# Altium PCB somiqboard.PcbDoc (part 1 of 10)
Units mm, origin at the board's own origin, x right, y up, seen from the top; angles counter-clockwise.
Board outline 110 x 96 mm, 4 copper layers (Top Layer, Ground_Plane, Power_Plane, Bottom Layer), stack 1.454 mm thick; 221 components, 356 nets, 1185 pads, 539 vias.
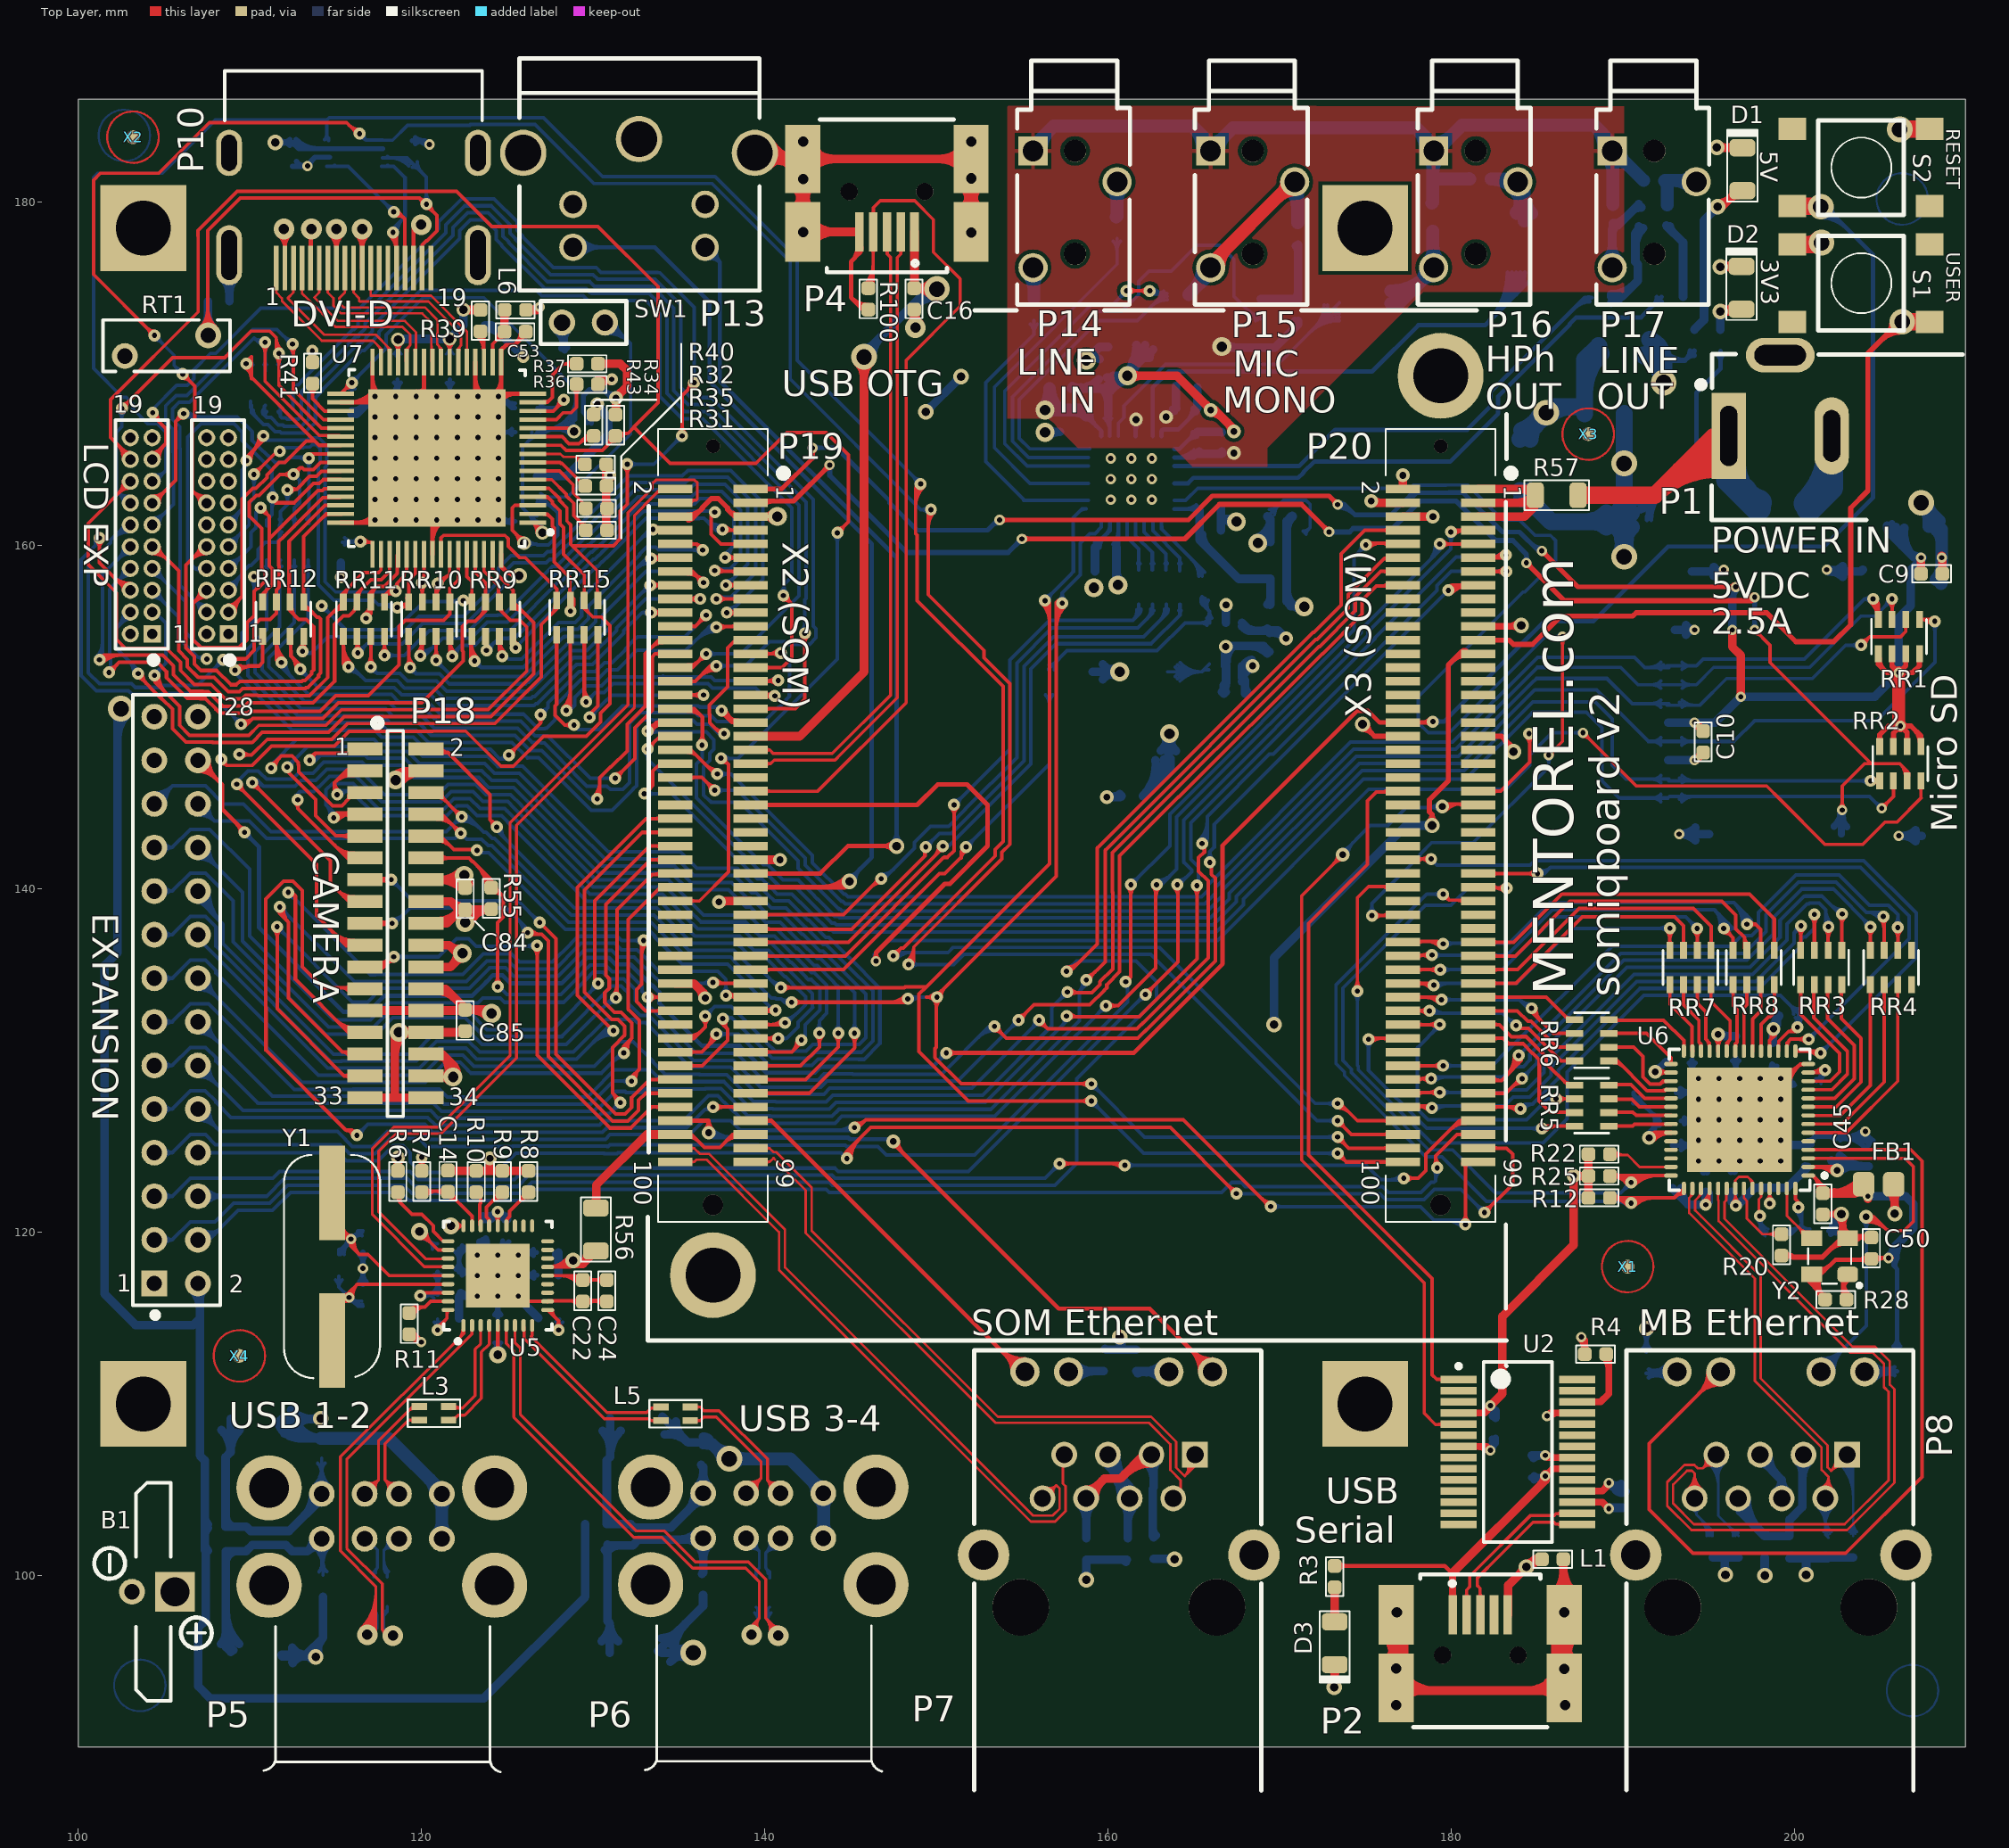
[diagram p0: Top Layer view]
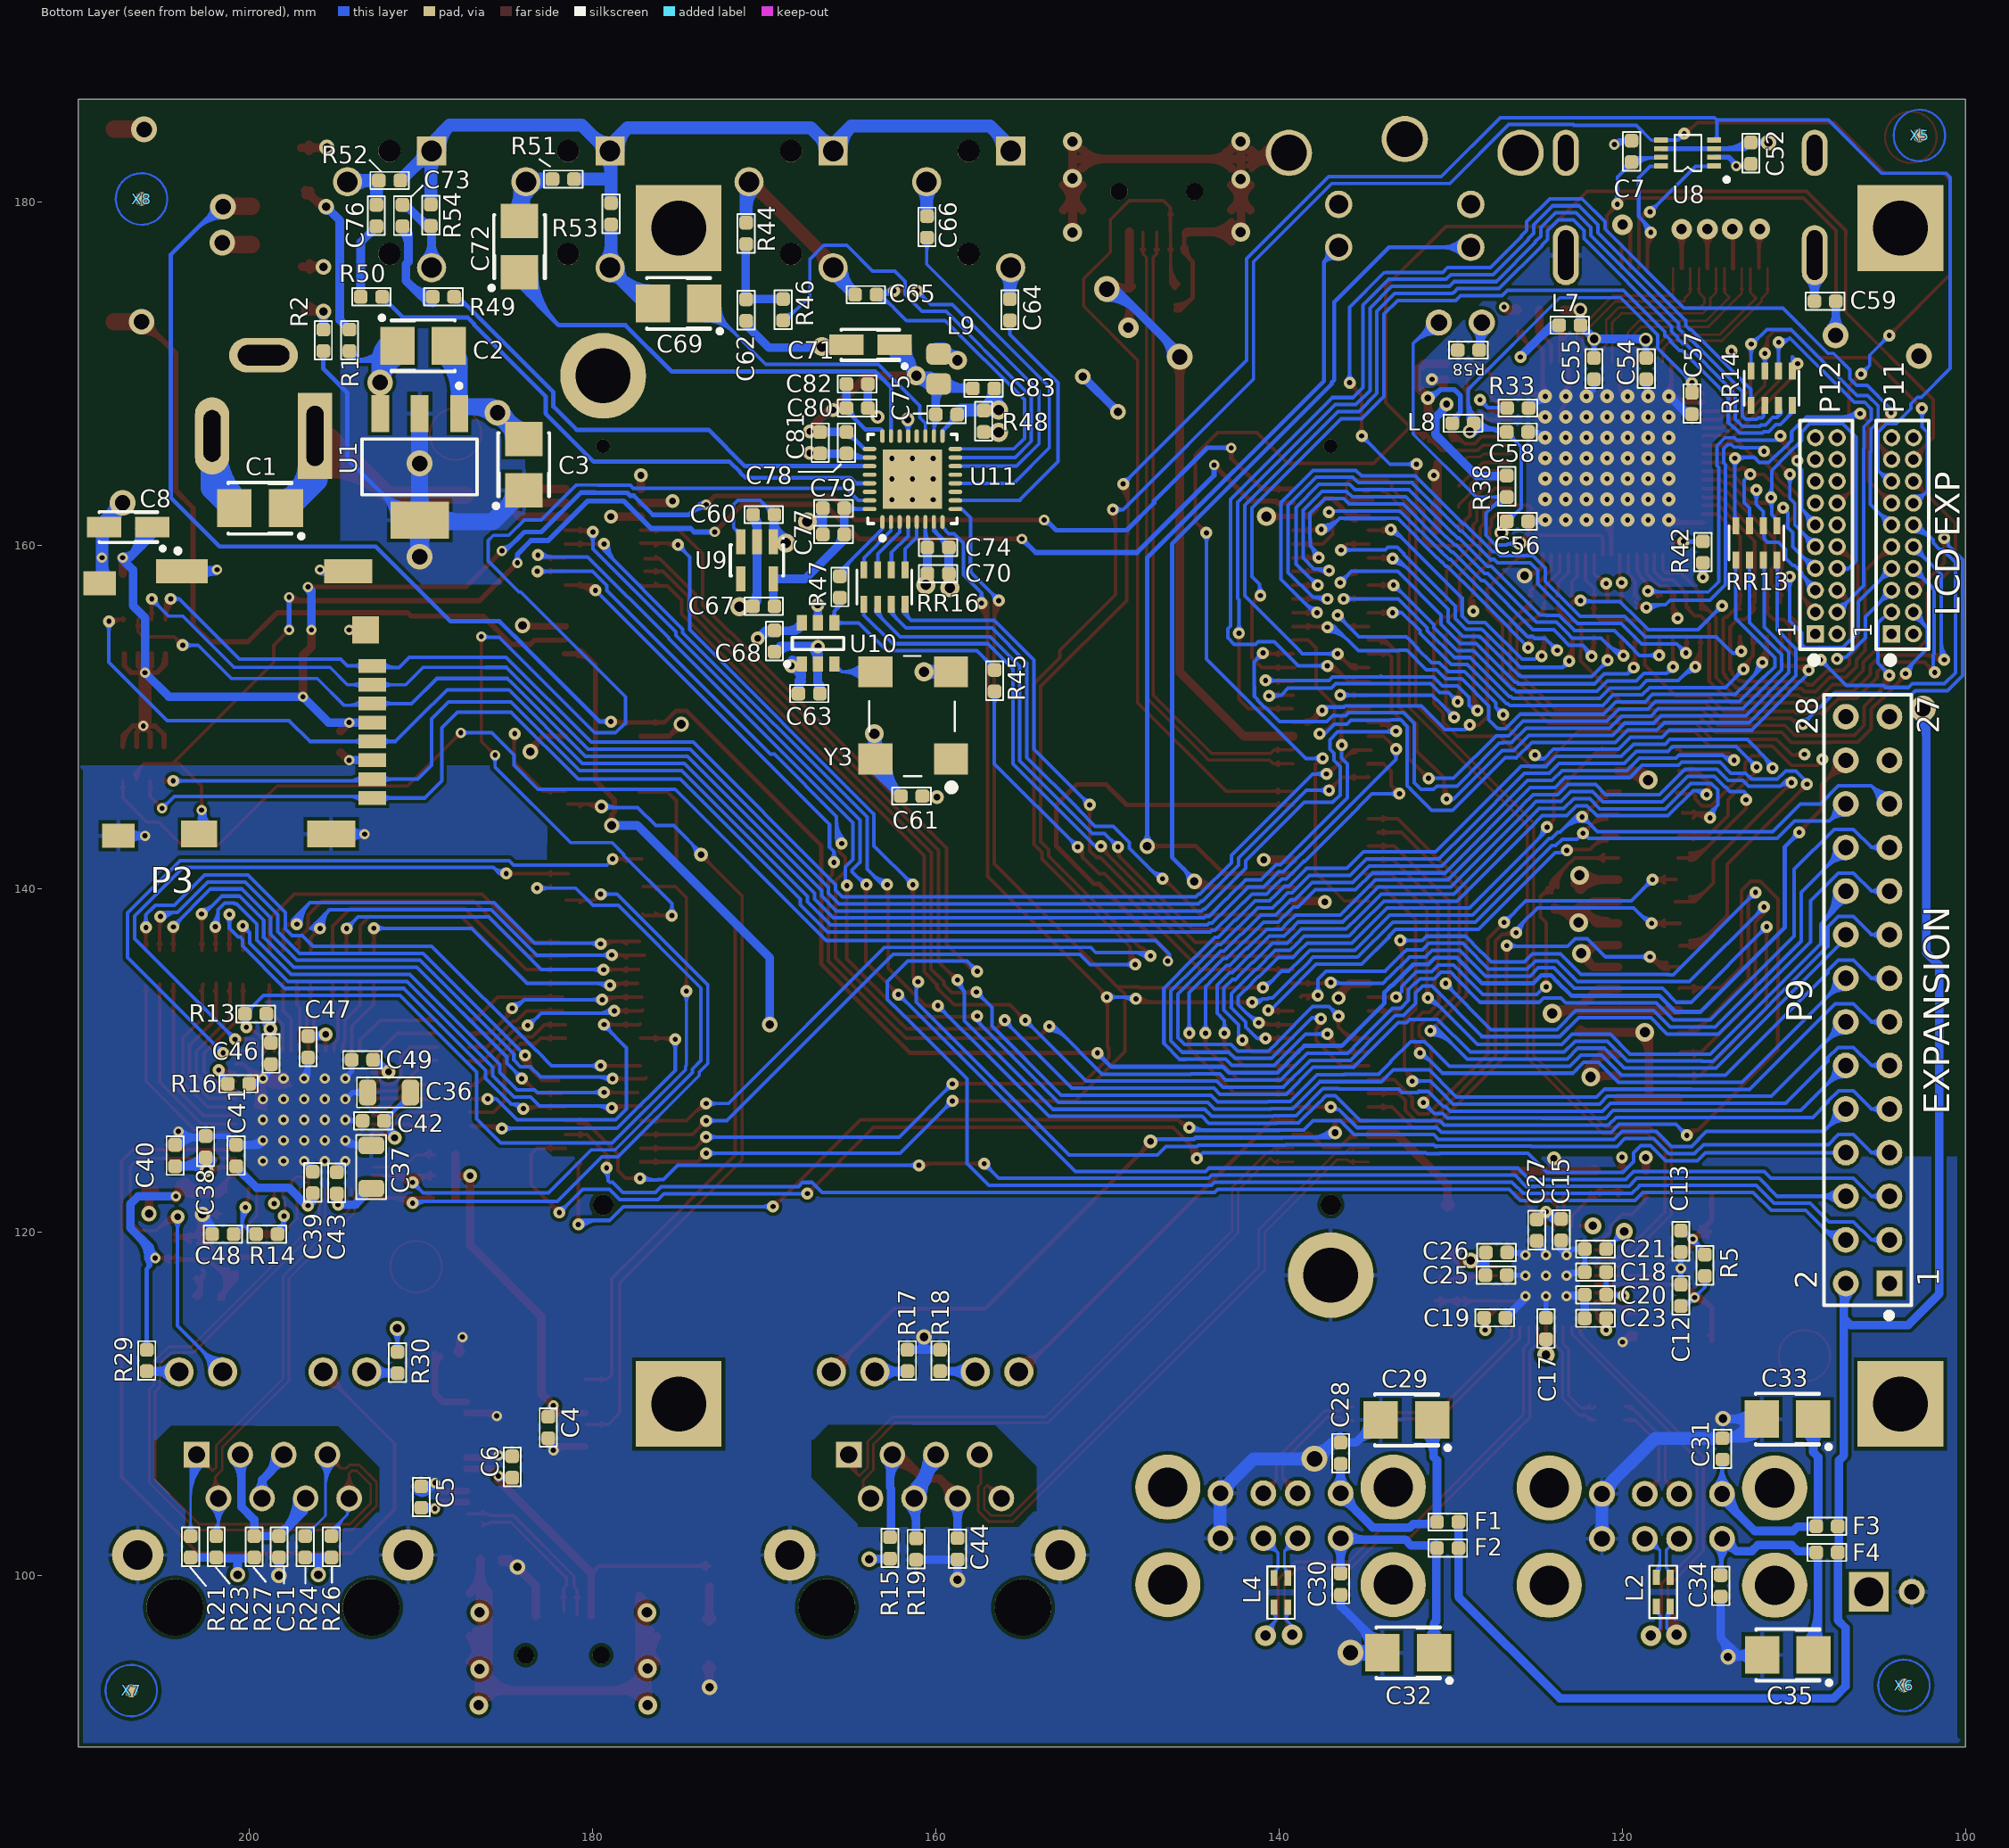
[diagram p1: Bottom Layer view, seen from below]
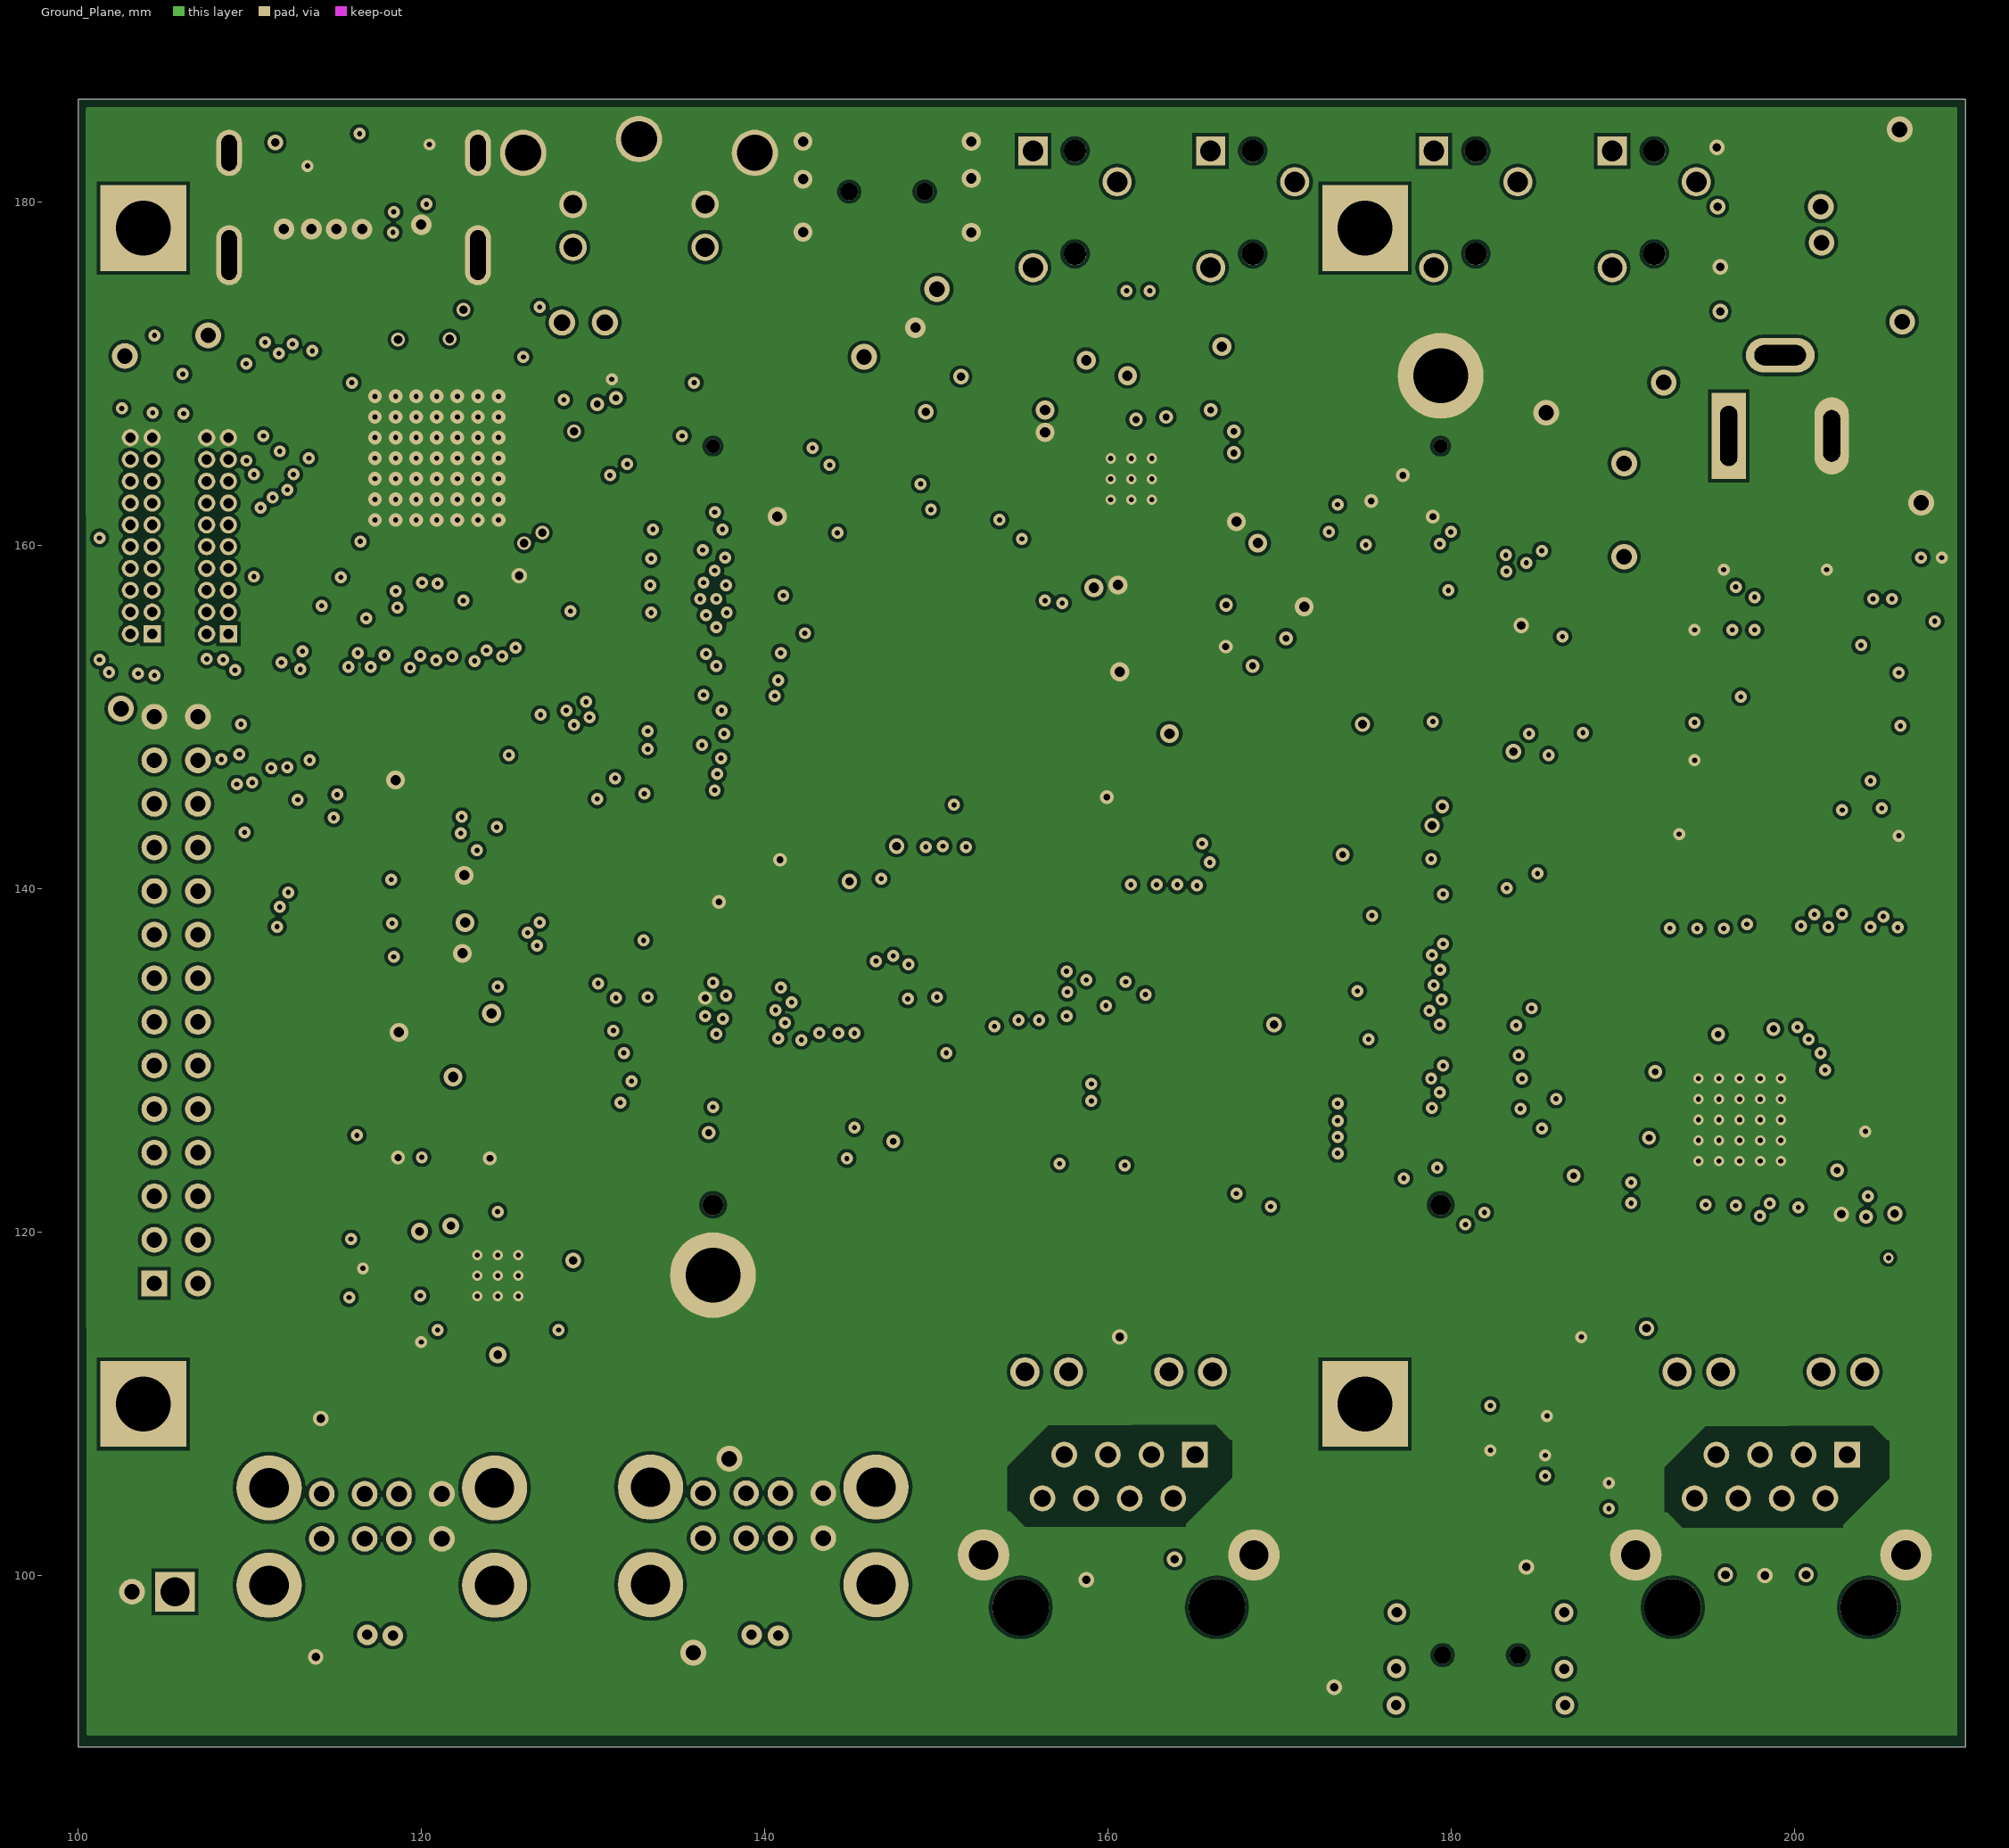
[diagram p2: Ground_Plane]
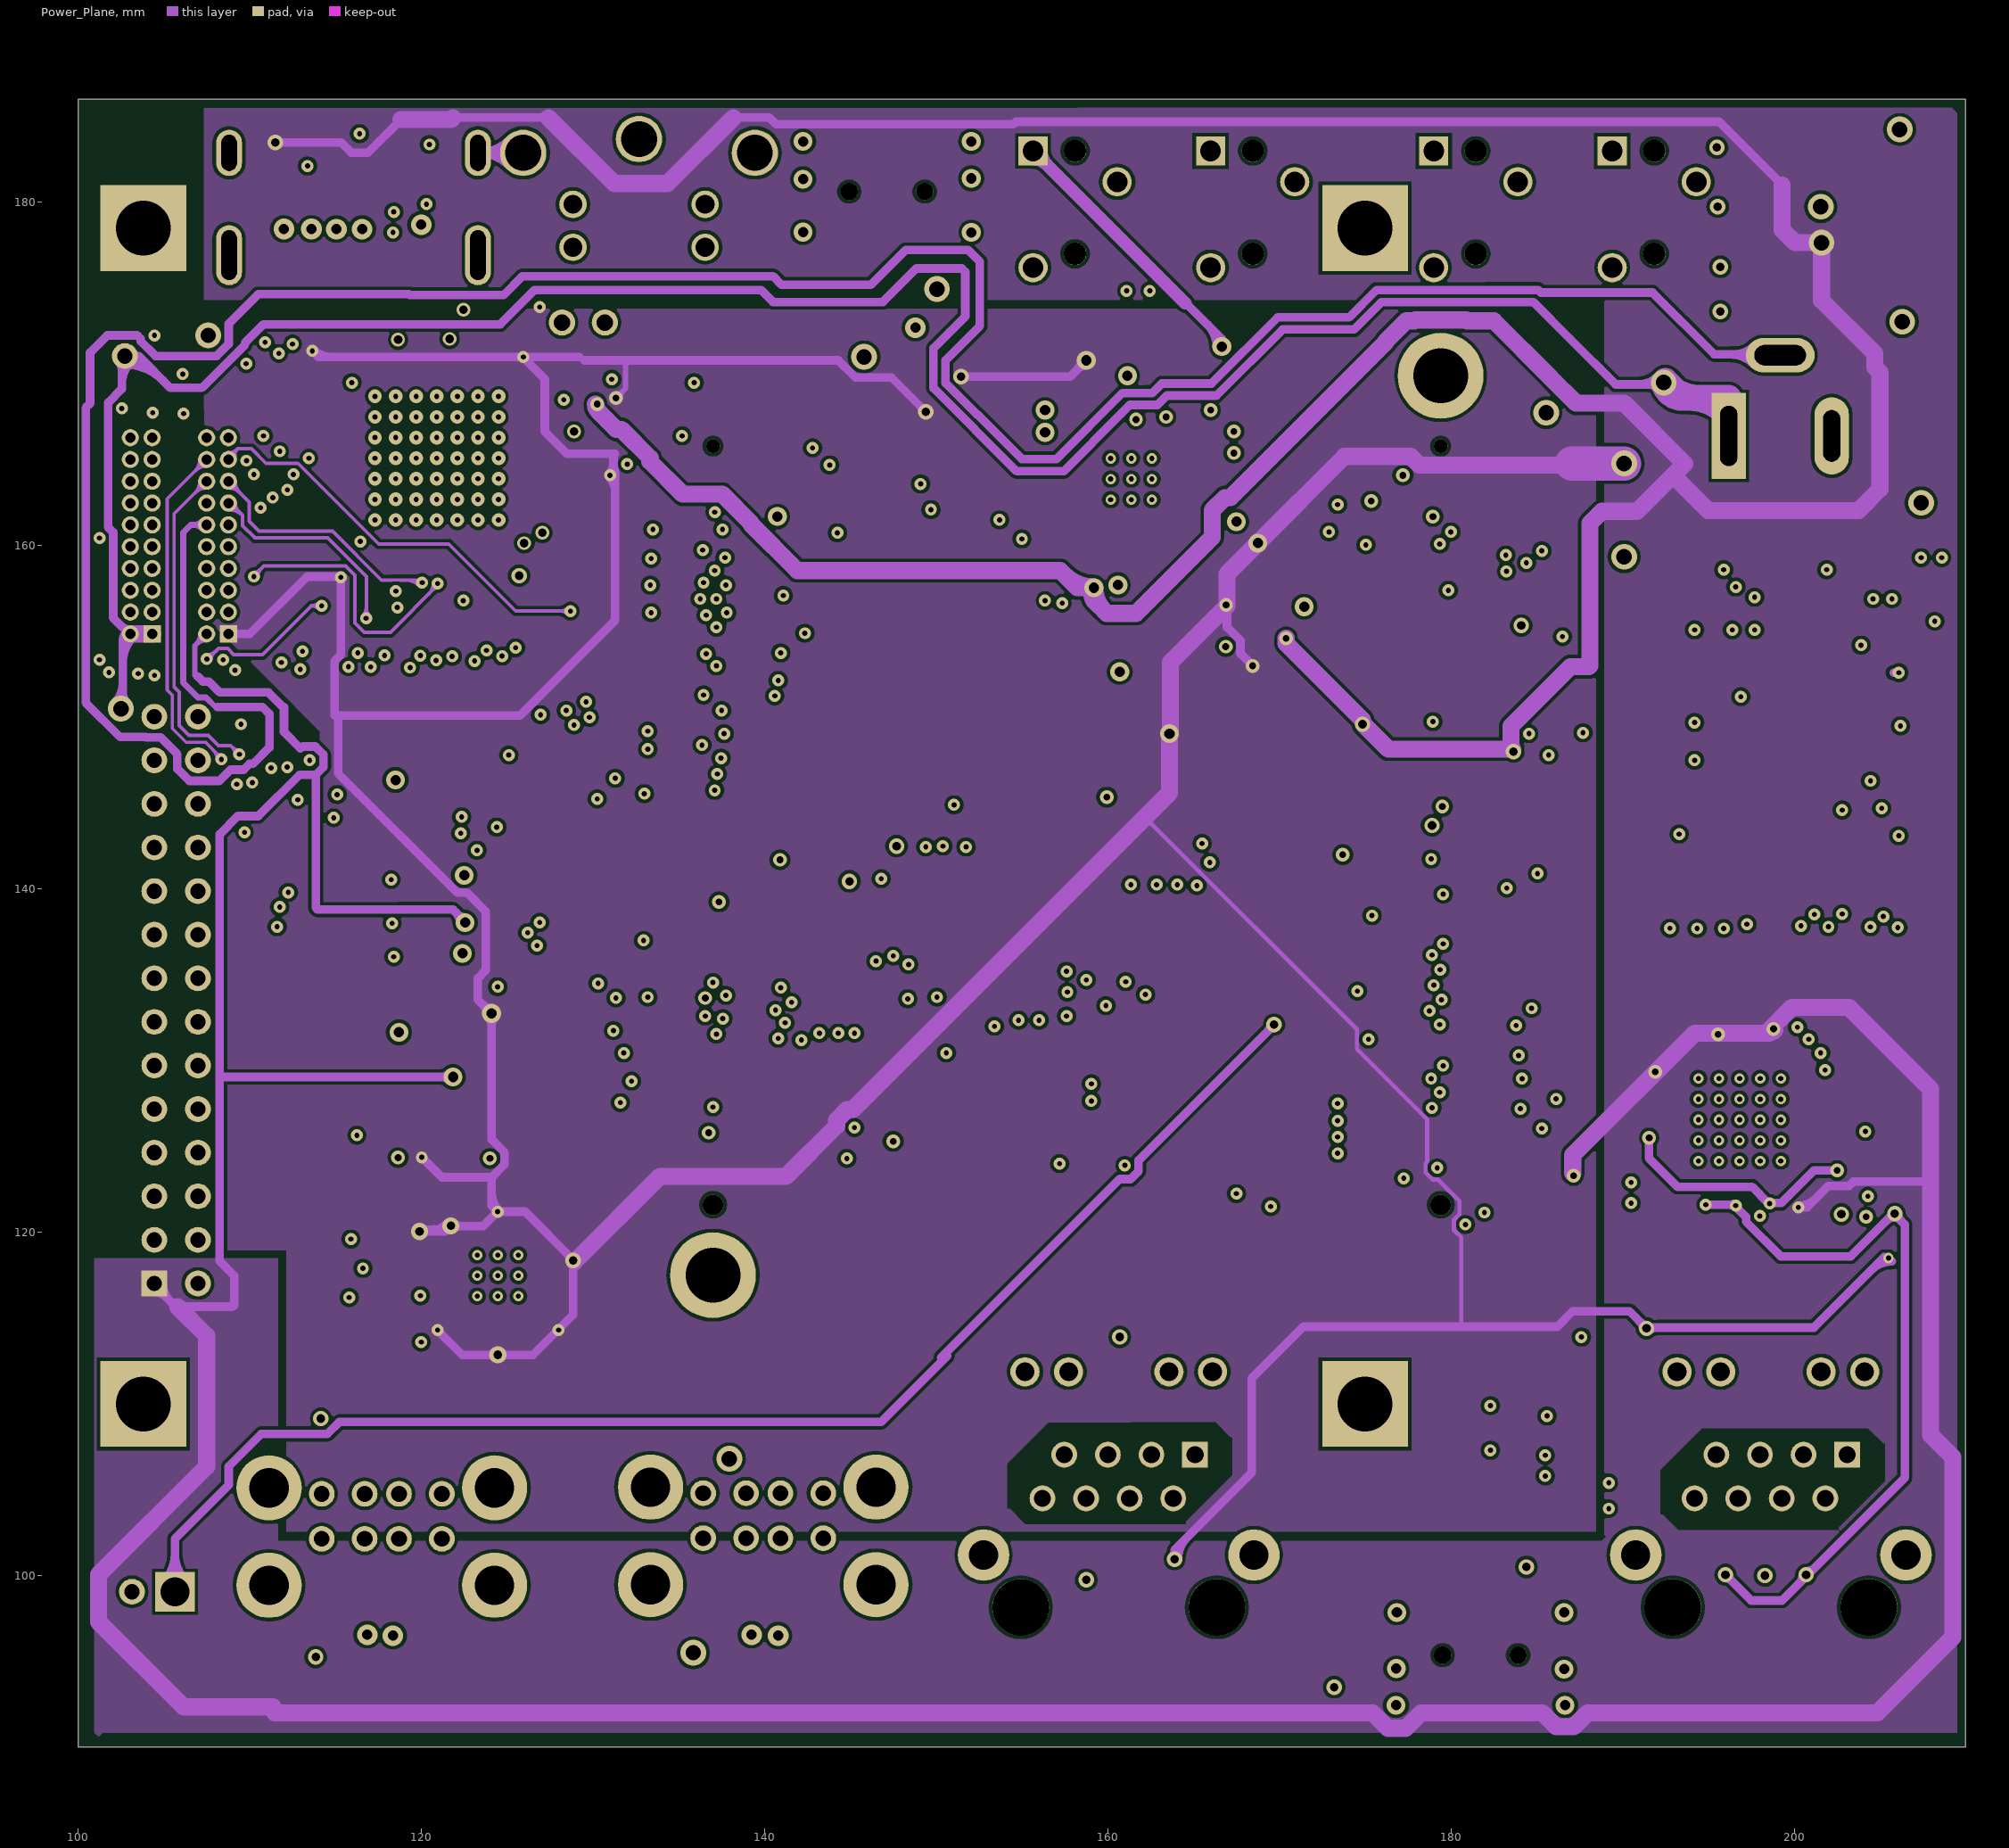
[diagram p3: Power_Plane]

## Layer stack, top to bottom
Top Layer: signal copper 0.06
Dielectric: prepreg 0.132, FR-4, Dk 4.2
Ground_Plane: signal copper 0.035
Dielectric: core 1, FR-4, Dk 4.2
Power_Plane: signal copper 0.035
Dielectric: prepreg 0.132, FR-4, Dk 4.2
Bottom Layer: signal copper 0.06

## Board outline
100,90 100,186 210,186 210,90

## Design rules (kind name [scope] priority, off if disabled: settings)
Clearance Clearance_USB_DIFF [(InNetClass('USB_DIFF'))] p1: gap=0.2
Clearance Clearance_100_DIFF [(InNetClass('100_DIFF'))] p2: gap=0.2
Clearance Clearance_50_Ohm [(InNetClass('50_Ohm'))] p3: gap=0.2
Clearance [(InNet('VCC_IO') AND OnLayer('MidLayer1'))] p4: gap=0.35
Clearance Clearance_ALL [All] p5: gap=0.2
ComponentClearance [All] p1: gap=0.25 collisioncheckmode=3 verticalgap=0.25 showdistances=FALSE
DiffPairsRouting [All] p1: maxlimit=0.2 minlimit=0.2 mostfreqgap=0.2 maxuncoupledlength=10
FabricationTestPointUsage TestPointUsage [All] p1: valid=0 allowmultiple=FALSE
FabricationTestpoint Testpoint [All] p1: side=3 testpointundercomponent=TRUE minsize=1.016 maxsize=2.54 preferedsize=1.524 minholesize=0 maxholesize=1.016 preferedholesize=0.813 testpointgrid=0.025 allowsidetop=TRUE allowsidebottom=TRUE usegrid=TRUE gridtolerance=0
HoleSize [All] p1: absolutevalues=TRUE maxlimit=5 minlimit=0.3 maxpercent=80.000 minpercent=20.000
HoleToHoleClearance [All] p1: gap=0.25 allowstackedmicrovias=TRUE
MinimumSolderMaskSliver [All] p1: minsoldermaskwidth=0.05
PlaneClearance [All] p1: clearance=0.5
PlaneConnect [All] p1: planeconnectstyle=Relief reliefexpansion=0.5 reliefentries=4 reliefconductorwidth=0.25 reliefairgap=0.25
PolygonConnect [IsVia] p1: connectstyle=Direct reliefconductorwidth=0.254 reliefentries=4 polygonreliefangle="90 Angle"
PolygonConnect PolygonConnect_L1 [OnLayer('Ground_Plane')] p2: connectstyle=Direct reliefconductorwidth=0.254 reliefentries=4 polygonreliefangle="90 Angle"
PolygonConnect PolygonConnect_L2 [OnLayer('Power_Plane')] p3: connectstyle=Direct reliefconductorwidth=0.35 reliefentries=4 polygonreliefangle="90 Angle"
RoutingVias [All] p1: holewidth=0.6 width=1.2 viastyle="Through Hole" minholewidth=0.3 minwidth=0.7 maxholewidth=3.2 maxwidth=5
SilkToSilkClearance [All] p1: silktosilkclearance=-0.05
SilkscreenOverComponentPads [All] p1: minsilkscreentomaskgap=0.01
SolderMaskExpansion [All] p1: expansion=0.102
Width Width_50_Ohm [(InNetClass('50_Ohm'))] p1: maxlimit=0.254 minlimit=0.2 preferedwidth=0.254 toplayer_maxwidth=0.21 toplayer_prefwidth=0.21 midlayer1_maxwidth=0.21 midlayer1_prefwidth=0.21 midlayer2_minwidth=0.254 bottomlayer_maxwidth=0.21 bottomlayer_prefwidth=0.21 minimp=50.000000 maximp=50.000000 favimp=50.000000
Width Width_90_Diff [(InNet('USB_X8_P') AND InNet('USB_X8_N') AND InNet('USB4__P') AND InNet('USB4__N') AND InNet('USB4_P') AND InNet('USB4_N') AND InNet('USB3__P') AND InNet('USB3__N') AND InNet('USB3_P') AND InNet('USB3_N') AND InNet('USB2__N') AND InNet('USB2__P') AND InNet('USB2_P') AND InNet('USB2_N') AND InNet('USB1__P') AND InNet('USB1__N') AND InNet('USB1_P') AND InNet('USB1_N') AND InNet('USB0_D_P') AND InNet('USB0_D_N') AND InNet('HSUSB2_D_P') AND InNet('HSUSB2_D_N') AND InNet('HSUSB1_D_P') AND InNet('HSUSB1_D_N'))] p2: maxlimit=0.186 minlimit=0.173 preferedwidth=0.186
Width Width_100_Ohm [(InNetClass('100_DIFF'))] p3: maxlimit=0.144 minlimit=0.132 preferedwidth=0.144
Width Width_Power [(InNet('3V3') AND InNet('5V0') AND InNet('AIC_1V8') AND InNet('AGND') AND InNet('AVDD') AND InNet('DVI_+5V') AND InNet('GND') AND InNet('TVDD') AND InNet('USB0_VBUS') AND InNet('VBUS') AND InNet('VCC_IO') AND InNet('VDD_A') AND InNet('VIO_1V8'))] p4: maxlimit=3 minlimit=0.25 preferedwidth=0.5 toplayer_maxwidth=1.2 toplayer_prefwidth=0.35 midlayer2_minwidth=0.254 midlayer2_maxwidth=0.254 midlayer2_prefwidth=0.254 bottomlayer_maxwidth=1.2 bottomlayer_prefwidth=0.35 minimp=50.000000 maximp=50.000000 favimp=50.000000
Width [All] p5: maxlimit=2 minlimit=0.12 preferedwidth=0.254 toplayer_prefwidth=0.21 midlayer1_prefwidth=0.21 midlayer2_minwidth=0.254 midlayer2_maxwidth=0.254 bottomlayer_prefwidth=0.21 minimp=50.000000 maximp=50.000000 favimp=50.000000
17 further rules are at their usual default settings.

## Classes and differential pairs
component class USB: C12 C13 C14 C15 C16 C17 C18 C19 C20 C21 C22 C23 C24 C25 C26 C27 C28 C29 C30 C31 C32 C33 C34 C35 F1 F2 F3 F4 L2 L3 L4 L5 P4 P5 P6 R5 R6 R7 R8 R9 R10 R11 R100 U5 X1 X2 X3 X4 X5 X6 X7 X8 Y1
component class SOM_connectors: P19 P20 R56 R57
component class Serial: C4 C5 C6 D3 L1 P2 R3 R4 U2
component class SD_MMC: C8 C9 C10 P3 RR1 RR2
component class Power: B1 C1 C2 C3 D1 D2 P1 R1 R2 S1 S2 U1
component class HDMI: C7 C52 C53 C54 C55 C56 C57 C58 C59 L6 L7 L8 P10 P11 P12 P13 R31 R32 R33 R34 R35 R36 R37 R38 R39 R40 R41 R42 R43 R58 RR9 RR10 RR11 RR12 RR13 RR14 RR15 RT1 SW1 U7 U8
component class ETHERNET: C36 C37 C38 C39 C40 C41 C42 C43 C44 C45 C46 C47 C48 C49 C50 C51 FB1 P7 P8 P9 R12 R13 R14 R15 R16 R17 R18 R19 R20 R21 R22 R23 R24 R25 R26 R27 R28 R29 R30 RR3 RR4 RR5 RR6 RR7 RR8 U6 Y2
component class CAMERA: C84 C85 P18 R55
component class Audio: C60 C61 C62 C63 C64 C65 C66 C67 C68 C69 C70 C71 C72 C73 C74 C75 C76 C77 C78 C79 C80 C81 C82 C83 L9 P14 P15 P16 P17 R44 R45 R46 R47 R48 R49 R50 R51 R52 R53 R54 RR16 U9 U10 U11 Y3
differential pair USB0_D: +USB0_D_P -USB0_D_N
differential pair TPO: +TPO_P -TPO_N
differential pair TPI: +TPI_P -TPI_N
differential pair HSUSB1_D: +HSUSB1_D_P -HSUSB1_D_N
differential pair ETH_TX: +ETH_TX_P -ETH_TX_N
differential pair ETH_RX: +ETH_RX_P -ETH_RX_N
differential pair USB_X8: +USB_X8_P -USB_X8_N
differential pair USB4: +USB4_P -USB4_N
differential pair USB4_: +USB4__P -USB4__N
differential pair USB3: +USB3_P -USB3_N
differential pair USB3_: +USB3__P -USB3__N
differential pair USB2: +USB2_P -USB2_N
differential pair USB2_: +USB2__P -USB2__N
differential pair USB1: +USB1_P -USB1_N
differential pair USB1_: +USB1__P -USB1__N
differential pair DAT2: +DAT2_P -DAT2_N
differential pair DAT1: +DAT1_P -DAT1_N
differential pair DAT0: +DAT0_P -DAT0_N
differential pair CLK: +CLK_P -CLK_N

## Components (designator, comment, footprint, x,y, rotation, side; value= is the part's Value field where it differs from the comment)
B1 "ML-1220/V1AN" ML1220-V1AN 104.394,99.06 r180 top
C1 "CAP B" B 199.39,162.179 r0 bottom
C2 "CAP B" B 189.89,171.653 r180 bottom
C3 "CAP B" B 184.023,164.719 r90 bottom
C4 "C0603" CHIP0603 182.6,108 r90 bottom
C5 "C0603" CHIP0603 190,105.2 r270 bottom
C6 "C0603" CHIP0603 184.7,105.7 r90 bottom
C7 "C0603" CHIP0603 119.475,183.6 r270 bottom
C8 "CAP A" A 207.069,161.083 r0 bottom
C9 "C0603" CHIP0603 207.391,158.369 r0 top
C10 "C0603" CHIP0603 194.7,149.2 r270 top
C12 "C0603" CHIP0603 116.6,115.7 r90 bottom
C13 "C0603" CHIP0603 116.6,120.1 r270 bottom
C14 "C0603" CHIP0603 121.554,123.599 r270 top
C15 "C0603" CHIP0603 123.575,119.525 r90 bottom
C16 "C0603" CHIP0603 148.717,175.006 r270 top
C17 "C0603" CHIP0603 124.46,113.767 r90 bottom
C18 "C0603" CHIP0603 120.955,117.678 r0 bottom
C19 "C0603" CHIP0603 128.067,115.011 r180 bottom
C20 "C0603" CHIP0603 120.955,116.357 r0 bottom
C21 "C0603" CHIP0603 120.955,119.024 r0 bottom
C22 "C0603" CHIP0603 129.413,117.221 r270 top
C23 "C0603" CHIP0603 120.955,114.986 r0 bottom
C24 "C0603" CHIP0603 130.81,117.221 r270 top
C25 "C0603" CHIP0603 127.991,117.5 r180 bottom
C26 "C0603" CHIP0603 127.965,118.821 r180 bottom
C27 "C0603" CHIP0603 125,120.75 r270 bottom
C28 "C0603" CHIP0603 136.423,106.502 r90 bottom
C29 "CAP B" B 132.588,109.068 r0 bottom
C30 "C0603" CHIP0603 136.423,100.127 r270 bottom
C31 "C0603" CHIP0603 114.173,106.756 r90 bottom
C32 "CAP B" B 132.486,95.504 r0 bottom
C33 "CAP B" B 110.388,109.118 r0 bottom
C34 "C0603" CHIP0603 114.275,100.025 r270 bottom
C35 "CAP B" B 110.363,95.377 r0 bottom
C36 "C0805" CHIP0805 190.627,128.143 r0 bottom
C37 "C0805" CHIP0805 192.913,122.555 r90 bottom
C38 "C0603" CHIP0603 202.565,125.603 r270 bottom
C39 "C0603" CHIP0603 196.325,123.525 r270 bottom
C40 "C0603" CHIP0603 204.343,125.095 r270 bottom
C41 "C0603" CHIP0603 200.787,125.095 r270 bottom
C42 "C0603" CHIP0603 193.421,126.492 r180 bottom
C43 "C0603" CHIP0603 194.925,123.5 r270 bottom
C44 "C0603" CHIP0603 158.75,102.184 r270 bottom
C45 "C0603" CHIP0603 201.676,121.031 r90 top
C46 "C0603" CHIP0603 198.755,129.794 r90 bottom
C47 "C0603" CHIP0603 196.596,130.175 r90 bottom
C48 "C0603" CHIP0603 202.184,119.888 r180 bottom
C49 "C0603" CHIP0603 194.056,130.048 r180 bottom
C50 "C0603" CHIP0603 204.5,119.7 r270 top
C51 "C0603" CHIP0603 198.287,102.299 r270 bottom
C52 "C0603" CHIP0603 112.522,182.245 r90 bottom
C53 "C0603" CHIP0603 124.841,172.466 r0 top
C54 "C0603" CHIP0603 118.618,170.942 r270 bottom
C55 "C0603" CHIP0603 121.666,170.942 r270 bottom
C56 "C0603" CHIP0603 126.746,161.417 r180 bottom
C57 "C0603" CHIP0603 115.951,168.91 r270 bottom
C58 "C0603" CHIP0603 126.746,166.624 r180 bottom
C59 "C0603" CHIP0603 107.569,174.244 r0 bottom
C60 "C0603" CHIP0603 169.418,161.81 r0 bottom
C61 "C0603" CHIP0603 162.052,145.415 r180 bottom
C62 "C0603" CHIP0603 171.069,173.101 r90 bottom
C63 "C0603" CHIP0603 168.021,151.384 r180 bottom
C64 "C0603" CHIP0603 155.702,174.371 r270 bottom
C65 "C0603" CHIP0603 164.719,174.625 r180 bottom
C66 "C0603" CHIP0603 160.528,179.197 r270 bottom
C67 "C0603" CHIP0603 169.418,156.476 r0 bottom
C68 "C0603" CHIP0603 169.418,155.067 r270 bottom
C69 "CAP B" B 175.006,174.117 r0 bottom
C70 "C0603" CHIP0603 159.258,158.369 r0 bottom
C71 "CAP A" A 163.83,171.704 r0 bottom
C72 "CAP B" B 184.277,177.419 r90 bottom
C73 "C0603" CHIP0603 191.093,178.609 r90 bottom
C74 "C0603" CHIP0603 159.258,159.893 r0 bottom
C75 "C0603" CHIP0603 160.02,167.64 r180 bottom
C76 "C0603" CHIP0603 192.617,178.609 r90 bottom
C77 "C0603" CHIP0603 165.354,160.655 r0 bottom
C78 "C0603" CHIP0603 165.227,166.624 r270 bottom
C79 "C0603" CHIP0603 165.354,162.179 r0 bottom
C80 "C0603" CHIP0603 165.227,168.021 r180 bottom
C81 "C0603" CHIP0603 166.751,166.624 r270 bottom
C82 "C0603" CHIP0603 165.227,169.418 r180 bottom
C83 "C0603" CHIP0603 157.861,169.164 r180 bottom
C84 "C0603" CHIP0603 122.555,138.811 r90 top
C85 "C0603" CHIP0603 122.555,132.969 r270 top
D1 "LED0805" LED0805 196.986,180.684 r90 top
D2 "LED0805" LED0805 196.936,173.775 r90 top
D3 "LED0805" LED0805 173.228,97.307 r270 top
F1 "MFU0603" CHIP0603 130.81,103.124 r180 bottom
F2 "MFU0603" CHIP0603 130.81,101.6 r180 bottom
F3 "MFU0603" CHIP0603 108.712,102.87 r180 bottom
F4 "MFU0603" CHIP0603 108.712,101.346 r180 bottom
FB1 "BLM21PG221SN1D" CHIP2PINSM127P600-8N 204.925,122.8 r180 top
L1 "BLM18A-FB" CHIP0603 186.55,100.95 r180 top
L2 "DLW21H" DLW21H 117.624,99.046 r90 bottom
L3 "DLW21H" DLW21H 120.737,109.452 r180 top
L4 "DLW21H" DLW21H 139.903,99.009 r90 bottom
L5 "DLW21H" DLW21H 134.823,109.423 r0 top
L6 "BLM18A-FB" CHIP0603 126.111,173.736 r180 top
L7 "BLM18A-FB" CHIP0603 123.698,172.847 r180 bottom
L8 "BLM18A-FB" CHIP0603 129.921,167.132 r180 bottom
L9 "BLM21PG221SN1D" CHIP2PINSM127P600-8N 159.85,170.3 r270 bottom
P1 "PJ-002A" PJ-002A 196.19,166.395 r90 top locked
P2 "MiniUSB-B" "MINI-USB-B5 SMT" 177.216,91.465 r90 top locked
P3 "49225-0821" SDCard 200.8,150.8 r270 bottom locked
P4 "MiniUSB-AB" "MINI-USB-B5 SMT" 151.638,184.531 r270 top locked
P5 "USBA-2J" USBA-2J 117.7,102.271 r0 top locked
P6 "USBA-2J" USBA-2J 139.929,102.309 r0 top locked
P7 "J1011F01P" "Ethernet J1" 156.2,104.5 r0 top
P8 "J1011F01P" "Ethernet J1" 194.2,104.5 r0 top
P9 "PBD-28" HDR2X14_Board2 104.445,117.018 r90 bottom locked
P10 "HDMI connector" "HDMI connector" 116.053,179.527 r180 top locked
P11 "HDR_1.27x1.27x20pins" MHDR2X10 103.048,154.864 r90 bottom locked
P12 "HDR_1.27x1.27x20pins" MHDR2X10 107.493,154.864 r90 bottom locked
P13 "S-VHS 4pin" MDN-4FR 132.69,180.188 r0 top locked
P14 "AUB-13" AUB_13 155.651,183 r90 top
P15 "AUB-13" AUB_13 166,183 r90 top
P16 "AUB-13" AUB_13 179,183 r90 top locked
P17 "AUB-13" AUB_13 189.4,183 r90 top locked
P18 "20021321-00034T4LF" 20021321-00034T4LF 118.491,138.049 r270 top locked
P19 "1-5177986-4" 1-5177986-4 137,143.7 r270 top locked
P20 "1-5177986-4" 1-5177986-4 179.4,143.7 r270 top locked
R1 "R0603" CHIP0603 194.183,172.593 r270 bottom
R2 "R0603" CHIP0603 195.707,172.593 r270 bottom
R3 "R0603" CHIP0603 173.228,99.314 r90 top
R4 "R0603" CHIP0603 187.8,112.9 r0 top
R5 "R0603" CHIP0603 115.2,118.7 r270 bottom
R6 "R0603" CHIP0603 118.633,122.329 r90 top
R7 "R0603" CHIP0603 120.03,122.329 r90 top
R8 "R0603" CHIP0603 126.253,122.329 r90 top
R9 "R0603" CHIP0603 124.729,122.329 r90 top
R10 "R0603" CHIP0603 123.205,122.329 r90 top
R11 "R0603" CHIP0603 119.3,115.3 r270 top
R12 "R0603" CHIP0603 189.267,122.006 r180 top
R13 "R0603" CHIP0603 200.279,132.715 r180 bottom
R14 "R0603" CHIP0603 198.374,119.888 r0 bottom
R15 "R0603" CHIP0603 162.687,102.235 r270 bottom
R16 "R0603" CHIP0603 200.025,128.651 r0 bottom
R17 "R0603" CHIP0603 161.671,113.157 r270 bottom
R18 "R0603" CHIP0603 159.766,113.157 r270 bottom
R19 "R0603" CHIP0603 161.163,100.914 r90 bottom
R20 "R0603" CHIP0603 199.263,119.888 r270 top
R21 "R0603" CHIP0603 203.445,101.054 r90 bottom
R22 "R0603" CHIP0603 189.267,124.546 r180 top
R23 "R0603" CHIP0603 201.946,101.054 r90 bottom
R24 "R0603" CHIP0603 196.763,101.054 r90 bottom
R25 "R0603" CHIP0603 189.267,123.276 r180 top
R26 "R0603" CHIP0603 195.239,101.054 r90 bottom
R27 "R0603" CHIP0603 199.735,101.054 r90 bottom
R28 "R0603" CHIP0603 201.803,116.078 r0 top
R29 "R0603" CHIP0603 205.994,113.157 r270 bottom
R30 "R0603" CHIP0603 191.389,113.03 r270 bottom
R31 "R0603" CHIP0603 130.835,160.901 r180 top
R32 "R0603" CHIP0603 130.802,163.477 r180 top
R33 "R0603" CHIP0603 125.476,168.021 r0 bottom
R34 "R0603" CHIP0603 131.318,167.64 r270 top
R35 "R0603" CHIP0603 130.835,162.171 r180 top
R36 "R0603" CHIP0603 130.3,169.4 r180 top
R37 "R0603" CHIP0603 130.3,170.6 r180 top
R38 "R0603" CHIP0603 126.746,164.084 r270 bottom
R39 "R0603" CHIP0603 123.444,173.736 r270 top
R40 "R0603" CHIP0603 129.532,164.747 r0 top
R41 "R0603" CHIP0603 113.665,170.688 r270 top
R42 "R0603" CHIP0603 115.316,159.004 r90 bottom
R43 "R0603" CHIP0603 130.048,167.64 r270 top
R44 "R0603" CHIP0603 171.069,178.816 r270 bottom
R45 "R0603" CHIP0603 156.591,151.511 r90 bottom
R46 "R0603" CHIP0603 168.91,174.371 r270 bottom
R47 "R0603" CHIP0603 165.608,156.972 r90 bottom
R48 "R0603" CHIP0603 157.226,166.624 r90 bottom
R49 "R0603" CHIP0603 188.087,174.498 r0 bottom
R50 "R0603" CHIP0603 192.278,174.498 r0 bottom
R51 "R0603" CHIP0603 181.102,181.356 r0 bottom
R52 "R0603" CHIP0603 191.22,181.276 r0 bottom
R53 "R0603" CHIP0603 178.943,179.959 r270 bottom
R54 "R0603" CHIP0603 189.442,179.879 r270 bottom
R55 "R0603" CHIP0603 124.079,140.081 r270 top
R56 "R0805" CHIP0805 130.175,121.412 r270 top
R57 "R0805" CHIP0805 184.912,162.941 r0 top
R58 "R0603" CHIP0603 129.6,171.4 r180 bottom
R100 "R0603" CHIP0603 146.05,175.006 r270 top
RR1 "CAY-J4" PACKAGE-J4 207.306,155.705 r270 top
RR2 "CAY-J4" PACKAGE-J4 204.987,146.301 r90 top
RR3 "CAY-J4" PACKAGE-J4 200.38,134.429 r90 top
RR4 "CAY-J4" PACKAGE-J4 204.444,134.429 r90 top
RR5 "CAY-J4" PACKAGE-J4 189.204,126.174 r180 top
RR6 "CAY-J4" PACKAGE-J4 189.204,129.984 r180 top
RR7 "CAY-J4" PACKAGE-J4 192.76,134.429 r90 top
RR8 "CAY-J4" PACKAGE-J4 196.443,134.429 r90 top
RR9 "CAY-J4" PACKAGE-J4 125.349,156.718 r270 top
RR10 "CAY-J4" PACKAGE-J4 121.666,156.718 r270 top
RR11 "CAY-J4" PACKAGE-J4 117.856,156.718 r270 top
RR12 "CAY-J4" PACKAGE-J4 113.157,156.718 r270 top
RR13 "CAY-J4" PACKAGE-J4 110.998,161.163 r270 bottom
RR14 "CAY-J4" PACKAGE-J4 110.109,170.18 r270 bottom
RR15 "CAY-J4" PACKAGE-J4 127.889,154.813 r90 top
RR16 "CAY-J4" PACKAGE-J4 164.211,156.591 r90 bottom
RT1 "PTC" PTC 105.156,171.653 r0 top
S1 "SWT-32" SWT-32 199.898,177.546 r0 top locked
S2 "SWT-32" SWT-32 199.898,184.277 r0 top locked
SW1 "Jumper 2-pin" JUMPER_2 128.2,173 r0 top
U1 "LM1117" SOT223 190.094,164.592 r0 bottom
U2 "FT232RL" SOP65P780X200-28N 183.9,107.2 r0 top
U5 "USB2514" QFN36 124.46,117.475 r90 top
U6 "LAN9221I" QFN56 196.824,126.555 r180 top
U7 "TFP410" PQFP64 120.904,165.1 r180 top locked
U8 "TXS0102DCU" PDSO8_DCU 116.205,182.88 r90 bottom
U9 "TPS72118" SOT23-5 170.434,159.143 r0 bottom
U10 "SN74LVC1T45DBVR" SOT95P280X145-6L 166.878,154.305 r90 bottom
U11 "TLV320AIC3104" QFN32 161.377,163.885 r90 bottom
X1 "Not Mount" POINT 190.3,118 r0 top
X2 "Not Mount" POINT 103.2,183.8 r0 top
X3 "Not Mount" POINT 188,166.5 r0 top
X4 "Not Mount" POINT 109.4,112.8 r0 top
X5 "Not Mount" POINT 102.7,183.9 r180 bottom
X6 "Not Mount" POINT 103.6,93.6 r180 bottom
X7 "Not Mount" POINT 206.9,93.3 r180 bottom
X8 "Not Mount" POINT 206.3,180.2 r180 bottom
Y1 "Geyer KX-K 24.0" HS49smd 114.8,118 r90 top
Y2 "ASEM" ASEM 202.05,118.6 r180 top locked
Y3 "KXO-V97" KXO_V97 159.131,147.574 r90 bottom

## Footprints (in the part's own frame and the unit in brackets; to place one, negate y for a bottom-side part, rotate by r counter-clockwise, add the part's x,y. Pads: shape width x height; smd on the part's side, far side on the other; paste and mask are expansions set on the pad)
1-5177986-4 [mm]
  rect 0.5x2 smd: 1(-19.6,2.2) 2(-19.6,-2.2) 3(-18.8,2.2) 4(-18.8,-2.2) 5(-18,2.2) 6(-18,-2.2) 7(-17.2,2.2) 8(-17.2,-2.2) 9(-16.4,2.2) 10(-16.4,-2.2) 11(-15.6,2.2) 12(-15.6,-2.2) 13(-14.8,2.2) 14(-14.8,-2.2) 15(-14,2.2) 16(-14,-2.2) 17(-13.2,2.2) 18(-13.2,-2.2) 19(-12.4,2.2) 20(-12.4,-2.2) 21(-11.6,2.2) 22(-11.6,-2.2) 23(-10.8,2.2) 24(-10.8,-2.2) 25(-10,2.2) 26(-10,-2.2) 27(-9.2,2.2) 28(-9.2,-2.2) 29(-8.4,2.2) 30(-8.4,-2.2) 31(-7.6,2.2) 32(-7.6,-2.2) 33(-6.8,2.2) 34(-6.8,-2.2) 35(-6,2.2) 36(-6,-2.2) 37(-5.2,2.2) 38(-5.2,-2.2) 39(-4.4,2.2) 40(-4.4,-2.2) 41(-3.6,2.2) 42(-3.6,-2.2) 43(-2.8,2.2) 44(-2.8,-2.2) 45(-2,2.2) 46(-2,-2.2) 47(-1.2,2.2) 48(-1.2,-2.2) 49(-0.4,2.2) 50(-0.4,-2.2) 51(0.4,2.2) 52(0.4,-2.2) 53(1.2,2.2) 54(1.2,-2.2) 55(2,2.2) 56(2,-2.2) 57(2.8,2.2) 58(2.8,-2.2) 59(3.6,2.2) 60(3.6,-2.2) 61(4.4,2.2) 62(4.4,-2.2) 63(5.2,2.2) 64(5.2,-2.2) 65(6,2.2) 66(6,-2.2) 67(6.8,2.2) 68(6.8,-2.2) 69(7.6,2.2) 70(7.6,-2.2) 71(8.4,2.2) 72(8.4,-2.2) 73(9.2,2.2) 74(9.2,-2.2) 75(10,2.2) 76(10,-2.2) 77(10.8,2.2) 78(10.8,-2.2) 79(11.6,2.2) 80(11.6,-2.2) 81(12.4,2.2) 82(12.4,-2.2) 83(13.2,2.2) 84(13.2,-2.2) 85(14,2.2) 86(14,-2.2) 87(14.8,2.2) 88(14.8,-2.2) 89(15.6,2.2) 90(15.6,-2.2) 91(16.4,2.2) 92(16.4,-2.2) 93(17.2,2.2) 94(17.2,-2.2) 95(18,2.2) 96(18,-2.2) 97(18.8,2.2) 98(18.8,-2.2) 99(19.6,2.2) 100(19.6,-2.2)
  silkscreen extent -23.1,-3.2 23.1,4.32, body extent -23.1,-3.3 23.1,3.1, height 5.6
20021321-00034T4LF [mm] "Connector; Socket; 17x2 Position"
  rect 0.76x2.05 smd paste+0: 1(-10.11,-1.775) 2(-10.11,1.775) 3(-8.84,-1.775) 4(-8.84,1.775) 5(-7.57,-1.775) 6(-7.57,1.775) 7(-6.3,-1.775) 8(-6.3,1.775) 9(-5.03,-1.775) 10(-5.03,1.775) 11(-3.76,-1.775) 12(-3.76,1.775) 13(-2.49,-1.775) 14(-2.49,1.775) 15(-1.22,-1.775) 16(-1.22,1.775) 17(0.05,-1.775) 18(0.05,1.775) 19(1.32,-1.775) 20(1.32,1.775) 21(2.59,-1.775) 22(2.59,1.775) 23(3.86,-1.775) 24(3.86,1.775) 25(5.13,-1.775) 26(5.13,1.775) 27(6.4,-1.775) 28(6.4,1.775) 29(7.67,-1.775) 30(7.67,1.775) 31(8.94,-1.775) 32(8.94,1.775) 33(10.21,-1.775) 34(10.21,1.775)
  silkscreen extent -11.85,-1.27 11.3,0.46
A [mm] "Capacitor, SM Tantalum; Body 3.2 x 1.6 mm (LxW typ)"
  rect 2x1.2 smd: 1(-1.4,0) 2(1.4,0)
  silkscreen extent -2.1,-0.9 1.7,1.35
ASEM [mm]
  rrect50% 1.2x0.9 smd mask+0: 1(-1.075,1.05)
  rect 1.2x0.9 smd mask+0: 2(-1.075,-1.05) 3(1.025,-1.05) 4(1.025,1.05)
  silkscreen extent -1.85,-1.65 1.23,1.8, body extent -1.27,-1.63 1.23,1.58, height 0.85
AUB_13 [mm] "3.5mm audio jack, PTH on pcb, 3 contacts"
  round 1.3 hole 1.3 unplated: 0(-6,-2.45) 0(0,-2.45)
  rect 1.7x1.7 hole 1.2: 1(0,0)
  round 1.7 hole 1.2: 2(-1.8,-4.9) 3(-6.8,0)
  silkscreen extent -8.95,-5.65 5.25,0.92, body extent -8.72,-5.38 5.2,0.6, height 5
B [mm] "Capacitor, SM Tantalum; Body 3.5 x 2.8 mm (LxW typ)"
  rect 2x2.2 smd: 1(-1.5,0) 2(1.5,0)
  silkscreen extent -2.52,-1.5 1.85,1.75
CHIP2PINSM127P600-8N [mm]
  rrect50% 1.25x1.45 smd: 1(-0.875,0) 2(0.875,0)
  body extent -1.1,-0.72 1.1,0.72, height 1.05
CHIP0603 [mm]
  rrect50% 0.8x0.8 smd: 1(0,0) 2(1.25,0)
  silkscreen extent -0.5,-0.5 1.75,0.5, body extent -0.53,-0.5 1.75,0.51, height 0.7
CHIP0805 [mm]
  rrect50% 1x1.5 smd: 1(0,0) 2(2.5,0)
  silkscreen extent -0.63,-0.87 3.13,0.87, body extent -0.64,-0.89 3.17,0.89, height 1
DLW21H [mm] "DLW21H Series Murata"
  rect 0.9x0.4 smd mask+0.05: 1(-0.85,-0.4) 2(0.85,-0.4) 3(0.85,0.4) 4(-0.85,0.4)
  silkscreen extent -1.52,-0.8 1.52,0.8, body extent -1,-0.6 1,0.6, height 1
"Ethernet J1" [mm] "J1011F01PNL PulseJack"
  round 3.3 hole 3.3 unplated: 0(-1.27,-6.35) 0(10.16,-6.35)
  rect 1.5x1.5 hole 1: 1(8.89,2.54)
  round 1.5 hole 1: 2(7.62,0) 3(6.35,2.54) 4(5.08,0) 5(3.81,2.54) 6(2.54,0) 7(1.27,2.54) 8(0,0)
  round 1.7 hole 1.1: 9(9.91,7.37) 10(7.37,7.37) 11(1.52,7.37) 12(-1.02,7.37)
  round 3 hole 1.7: 13(-3.43,-3.3) 13(12.32,-3.3)
  silkscreen extent -3.98,-17.02 12.75,8.62, body extent -3.7,-17.1 12.5,8.3, height 13.97
"HDMI connector" [mm] "HDMI connector without panel mount, PULSE manufacturer"
  rect 0.28x2.6 smd mask+0.05: 1(4.5,3.36) 2(4,3.36) 3(3.5,3.36) 4(3,3.36) 5(2.5,3.36) 6(2,3.36) 7(1.5,3.36) 8(1,3.36) 9(0.5,3.36) 10(0,3.36) 11(-0.5,3.36) 12(-1,3.36) 13(-1.5,3.36) 14(-2,3.36) 15(-2.5,3.36) 16(-3,3.36) 17(-3.5,3.36) 18(-4,3.36) 19(-4.5,3.36)
  oval 1.5x2.7 hole 0.9 slot 2.1 at 90 deg: 20(7.25,-3.36) 23(-7.25,-3.36)
  oval 1.5x3.5 hole 0.9 slot 2.9 at 90 deg: 21(7.25,2.6) 22(-7.25,2.6)
  silkscreen extent -7.5,-8.14 7.5,-5.24, body extent -7.5,-8.09 7.5,4.61, height 6.14
HDR2X14_Board2 [mm] "Connector; Header; 14x2 Position"
  rect 1.5x1.5 hole 0.9: 1(0,0)
  round 1.5 hole 0.9: 2(0,2.54) 3(2.54,0) 4(2.54,2.54) 5(5.08,0) 6(5.08,2.54) 7(7.62,0) 8(7.62,2.54) 9(10.16,0) 10(10.16,2.54) 11(12.7,0) 12(12.7,2.54) 13(15.24,0) 14(15.24,2.54) 15(17.78,0) 16(17.78,2.54) 17(20.32,0) 18(20.32,2.54) 19(22.86,0) 20(22.86,2.54) 21(25.4,0) 22(25.4,2.54) 23(27.94,0) 24(27.94,2.54) 25(30.48,0) 26(30.48,2.54) 27(33.02,0) 28(33.02,2.54)
  silkscreen extent -2.01,-1.27 34.29,3.81, body extent -1.3,-1.25 34.27,3.85, height 8.5
HS49smd [mm]
  rect 5.5x1.5 smd: 1(-4.3,0) 2(4.3,0)
  silkscreen extent -6.5,-2.8 6.5,2.8
JUMPER_2 [mil]
  round 60 hole 38: 1(0,0) 2(98.43,0)
  silkscreen extent -49,-49 148,49, body extent -50,-48 147,49, height 335
KXO_V97 [mm]
  rect 1.8x2 smd: 1(0,0) 2(5.08,0) 3(5.08,4.4) 4(0,4.4)
  silkscreen extent -1.86,-0.23 6,4.77, body extent -1,-0.22 6,4.78, height 1.3
LED0805 [mm]
  rrect50% 1x1.5 smd: 1(0,0) 2(2.5,0)
  silkscreen extent -0.63,-0.87 3.55,0.87, body extent -0.64,-0.89 3.17,0.89, height 1
MDN-4FR [mm]
  round 1.6 hole 1.1: 1(-3.85,-0.3) 2(3.85,-0.3) 3(-3.85,-2.8) 4(3.85,-2.8)
  round 2.7 hole 2.1: 5(6.75,2.7) 6(0,3.5) 7(-6.75,2.7)
  silkscreen extent -6.98,-5.32 7.03,8.2, body extent -7.04,-5.32 7,8.1, height 13
MHDR2X10 [mm] "Connector; Header; 10x2 Position"
  rect 1x1 hole 0.6: 1(0,1.27)
  round 1 hole 0.6: 2(0,0) 3(1.27,1.27) 4(1.27,0) 5(2.54,1.27) 6(2.54,0) 7(3.81,1.27) 8(3.81,0) 9(5.08,1.27) 10(5.08,0) 11(6.35,1.27) 12(6.35,0) 13(7.62,1.27) 14(7.62,0) 15(8.89,1.27) 16(8.89,0) 17(10.16,1.27) 18(10.16,0) 19(11.43,1.27) 20(11.43,0)
  silkscreen extent -1.73,-0.9 12.43,2.17, body extent -0.9,-0.85 12.42,2.22, height 8.5
"MINI-USB-B5 SMT" [mm]
  rect 2.3x0.5 smd: 1(6.25,-2.9) 2(6.25,-3.7) 3(6.25,-4.5) 4(6.25,-5.3) 5(6.25,-6.1)
  rect 4x2.05 smd: 6(2,-9.4) 7(2,0.4)
  rect 3.5x2.05 smd: 6(6.25,-9.4) 7(6.25,0.4)
  round 1 hole 1 unplated: SYSPAD10(3.9,-6.7) SYSPAD11(3.9,-2.3)
  silkscreen extent -0.3,-8.4 8.6,-0.6
ML1220-V1AN [mm]
  rect 2.3x2.3 hole 1.7: 1(-1.25,0)
  round 1.5 hole 0.9: 2(1.25,0)
  silkscreen extent -3.4,-6.35 3.45,6.35, body extent -1.02,-6.35 1.02,6.35, height 14.1
PACKAGE-J4 [mm]
  rect 1x0.4 smd: 1(0,0) 2(0,-0.8) 3(0,-1.6) 4(0,-2.4) 5(2,-2.4) 6(2,-1.6) 7(2,-0.8) 8(2,0)
  silkscreen extent 0,-2.8 2,0.4
PDSO8_DCU [mm] "Plastic Small Outline; 8 Leads; Body Width 3.15 mm; Pitch 0.65 mm"
  rect 0.3x0.8 smd mask+0.05: 1(-0.75,-1.55) 2(-0.25,-1.55) 3(0.25,-1.55) 4(0.75,-1.55) 5(0.75,1.55) 6(0.25,1.55) 7(-0.25,1.55) 8(-0.75,1.55)
  silkscreen extent -1.67,-2.4 1.05,0.75
PJ-002A [mm] "DC POWER JACK"
  rect 5x2 hole 1 slot 3.5 at 0 deg: 1(0,0)
  oval 4.5x2 hole 1 slot 3 at 0 deg: 2(0,-6)
  oval 2x4 hole 1.2 slot 3 at 90 deg: 3(4.7,-3)
  silkscreen extent -4.9,-13.64 4.77,1.81, body extent -4.43,-13.92 4.38,0.3, height 11
POINT [mm] "Point Pick"
  round 0.8 smd paste-1 mask+1: 1(0,0)
  Top Layer circle w0.12: c0,0 r1.5
PQFP64 [mm] "64-Pin Quad Flat Pad 0.5 mm Pitch, IPC Low Density"
  rect 1.55x0.25 smd: 1(-5.6,3.75) 2(-5.6,3.25) 3(-5.6,2.75) 4(-5.6,2.25) 5(-5.6,1.75) 6(-5.6,1.25) 7(-5.6,0.75) 8(-5.6,0.25) 9(-5.6,-0.25) 10(-5.6,-0.75) 11(-5.6,-1.25) 12(-5.6,-1.75) 13(-5.6,-2.25) 14(-5.6,-2.75) 15(-5.6,-3.25) 16(-5.6,-3.75) 33(5.6,-3.75) 34(5.6,-3.25) 35(5.6,-2.75) 36(5.6,-2.25) 37(5.6,-1.75) 38(5.6,-1.25) 39(5.6,-0.75) 40(5.6,-0.25) 41(5.6,0.25) 42(5.6,0.75) 43(5.6,1.25) 44(5.6,1.75) 45(5.6,2.25) 46(5.6,2.75) 47(5.6,3.25) 48(5.6,3.75)
  rect 0.25x1.55 smd: 17(-3.75,-5.6) 18(-3.25,-5.6) 19(-2.75,-5.6) 20(-2.25,-5.6) 21(-1.75,-5.6) 22(-1.25,-5.6) 23(-0.75,-5.6) 24(-0.25,-5.6) 25(0.25,-5.6) 26(0.75,-5.6) 27(1.25,-5.6) 28(1.75,-5.6) 29(2.25,-5.6) 30(2.75,-5.6) 31(3.25,-5.6) 32(3.75,-5.6) 49(3.75,5.6) 50(3.25,5.6) 51(2.75,5.6) 52(2.25,5.6) 53(1.75,5.6) 54(1.25,5.6) 55(0.75,5.6) 56(0.25,5.6) 57(-0.25,5.6) 58(-0.75,5.6) 59(-1.25,5.6) 60(-1.75,5.6) 61(-2.25,5.6) 62(-2.75,5.6) 63(-3.25,5.6) 64(-3.75,5.6)
  rect 8x8 smd: 65(0,0)
  silkscreen extent -6.75,-5.15 5.15,5.15, body extent -5,-4.97 5,5, height 1
PTC [mm]
  round 1.5 hole 0.9: 1(-2.427,-0.6) 2(2.427,0.6)
  silkscreen extent -3.7,-1.5 3.7,1.5, body extent -3.68,-0.76 3.68,0.89, height 11.6
QFN32 [mm] "32-Pin Quad Flat No-Lead 0.5 mm Pitch, IPC Medium Density"
  oval 0.8x0.25 smd: 1(-2.5,1.75) 2(-2.5,1.25) 3(-2.5,0.75) 4(-2.5,0.25) 5(-2.5,-0.25) 6(-2.5,-0.75) 7(-2.5,-1.25) 8(-2.5,-1.75) 17(2.5,-1.75) 18(2.5,-1.25) 19(2.5,-0.75) 20(2.5,-0.25) 21(2.5,0.25) 22(2.5,0.75) 23(2.5,1.25) 24(2.5,1.75)
  oval 0.25x0.8 smd: 9(-1.75,-2.5) 10(-1.25,-2.5) 11(-0.75,-2.5) 12(-0.25,-2.5) 13(0.25,-2.5) 14(0.75,-2.5) 15(1.25,-2.5) 16(1.75,-2.5) 25(1.75,2.5) 26(1.25,2.5) 27(0.75,2.5) 28(0.25,2.5) 29(-0.25,2.5) 30(-0.75,2.5) 31(-1.25,2.5) 32(-1.75,2.5)
  rect 3.45x3.45 smd: 33(0,0)
  silkscreen extent -3.57,-2.6 2.6,2.6, body extent -2.58,-2.58 2.58,2.58, height 1
QFN36 [mm] "36-Pin Quad Flat No-Lead 0.5 mm Pitch, IPC Medium Density"
  oval 0.75x0.25 smd: 1(-2.9,2) 2(-2.9,1.5) 3(-2.9,1) 4(-2.9,0.5) 5(-2.9,0) 6(-2.9,-0.5) 7(-2.9,-1) 8(-2.9,-1.5) 9(-2.9,-2) 19(2.9,-2) 20(2.9,-1.5) 21(2.9,-1) 22(2.9,-0.5) 23(2.9,0) 24(2.9,0.5) 25(2.9,1) 26(2.9,1.5) 27(2.9,2)
  oval 0.25x0.75 smd: 10(-2,-2.9) 11(-1.5,-2.9) 12(-1,-2.9) 13(-0.5,-2.9) 14(0,-2.9) 15(0.5,-2.9) 16(1,-2.9) 17(1.5,-2.9) 18(2,-2.9) 28(2,2.9) 29(1.5,2.9) 30(1,2.9) 31(0.5,2.9) 32(0,2.9) 33(-0.5,2.9) 34(-1,2.9) 35(-1.5,2.9) 36(-2,2.9)
  rect 3.7x3.7 smd: 37(0,0)
  silkscreen extent -3.95,-3.15 3.15,3.15, body extent -3,-3 3,3, height 1
QFN56 [mm] "QFN, 56-Leads, Body 8,1x8,1mm (max), Pitch 0,50mm, IPC Medium Density"
  oval 0.8x0.25 smd: 1(-4,3.25) 2(-4,2.75) 3(-4,2.25) 4(-4,1.75) 5(-4,1.25) 6(-4,0.75) 7(-4,0.25) 8(-4,-0.25) 9(-4,-0.75) 10(-4,-1.25) 11(-4,-1.75) 12(-4,-2.25) 13(-4,-2.75) 14(-4,-3.25) 29(4,-3.25) 30(4,-2.75) 31(4,-2.25) 32(4,-1.75) 33(4,-1.25) 34(4,-0.75) 35(4,-0.25) 36(4,0.25) 37(4,0.75) 38(4,1.25) 39(4,1.75) 40(4,2.25) 41(4,2.75) 42(4,3.25)
  oval 0.25x0.8 smd: 15(-3.25,-4) 16(-2.75,-4) 17(-2.25,-4) 18(-1.75,-4) 19(-1.25,-4) 20(-0.75,-4) 21(-0.25,-4) 22(0.25,-4) 23(0.75,-4) 24(1.25,-4) 25(1.75,-4) 26(2.25,-4) 27(2.75,-4) 28(3.25,-4) 43(3.25,4) 44(2.75,4) 45(2.25,4) 46(1.75,4) 47(1.25,4) 48(0.75,4) 49(0.25,4) 50(-0.25,4) 51(-0.75,4) 52(-1.25,4) 53(-1.75,4) 54(-2.25,4) 55(-2.75,4) 56(-3.25,4)
  rect 6.1x6.1 smd: 57(0,0)
  silkscreen extent -5.08,-4.1 4.1,4.1, body extent -4.08,-4.08 4.08,4.08, height 1
SDCard [mm] "molex 0492250821"
  rect 0.8x1.6 smd: 1(-2.2,7.95) 2(-1.1,7.95) 3(0,7.95) 4(1.1,7.95) 5(2.2,7.95) 6(3.3,7.95) 7(4.4,7.95) 8(5.5,7.95)
  rect 1.55x2.8 smd: 9(7.6,5.55)
  rect 1.55x2.1 smd: 10(7.6,-2.15)
  rect 1.4x1.9 smd: 11(7.7,-6.85) 12(-7,-7.95)
  rect 1.4x3 smd: 13(-7.7,-3.15)
  rect 1.4x2.8 smd: 14(-7.7,6.55)
  rect 1.6x1.55 smd: 15(-4.3,7.55)
  body extent -8.05,-8.5 8.05,8.55, height 1.95
SOP65P780X200-28N [mm] "SOP, 28-Leads, Body 10,5x5,6mm (max), Pitch 0,65mm, IPC Medium Density"
  rect 2.1x0.45 smd mask+0.05: 1(-3.45,4.225) 2(-3.45,3.575) 3(-3.45,2.925) 4(-3.45,2.275) 5(-3.45,1.625) 6(-3.45,0.975) 7(-3.45,0.325) 8(-3.45,-0.325) 9(-3.45,-0.975) 10(-3.45,-1.625) 11(-3.45,-2.275) 12(-3.45,-2.925) 13(-3.45,-3.575) 14(-3.45,-4.225) 15(3.45,-4.225) 16(3.45,-3.575) 17(3.45,-2.925) 18(3.45,-2.275) 19(3.45,-1.625) 20(3.45,-0.975) 21(3.45,-0.325) 22(3.45,0.325) 23(3.45,0.975) 24(3.45,1.625) 25(3.45,2.275) 26(3.45,2.925) 27(3.45,3.575) 28(3.45,4.225)
  silkscreen extent -3.57,-5.25 2,5.25, body extent -2.8,-5.25 2.8,5.25, height 2
SOT23-5 [mm] "SOT-23/SC-74A; 5 Leads; Body 3 x 3 mm, inc. leads (LxW max)"
  rect 0.55x1.45 smd: 1(-0.95,-1.075) 2(0,-1.075) 3(0.95,-1.075) 4(0.95,1.075) 5(-0.95,1.075)
  silkscreen extent -1.57,-1.35 1.55,0.9
SOT95P280X145-6L [mm] "SOT23, 6-Leads, Body 3,0x3,0mm (max), Pitch 0,95mm, IPC High Density"
  rect 0.9x0.6 smd: 1(-1.2,0.95) 2(-1.2,0) 3(-1.2,-0.95) 4(1.2,-0.95) 5(1.2,0) 6(1.2,0.95)
  silkscreen extent -1.32,-1.5 0.35,1.93, body extent -0.87,-1.5 0.87,1.5, height 1.45
SOT223 [mm] "SOT-223/SC-73; 4 Leads; Body 6.7 x 7.3 mm, inc. leads (LxW max)"
  rect 1.05x2.15 smd: 1(-2.3,-3.1) 2(0,-3.1) 3(2.3,-3.1)
  rect 3.4x2.15 smd: 4(0,3.1)
  silkscreen extent -3.35,-4.85 3.35,1.63
SWT-32 [mm]
  rect 1.6x1.3 smd: 1(0,0) 2(8,0) 3(0,-4.5) 4(8,-4.5)
  silkscreen extent 1.5,-5 6.5,0.5
USBA-2J [mm] "Разъем USB (м) на плату, двойной, тип А , тип 1"
  round 3.8 hole 2.3 mask+0.05: 5(-6.57,-2.84) 6(-6.57,2.84) 7(6.57,-2.84) 8(6.57,2.84)
  round 1.5 hole 0.92 mask+0.05: A1(-3.5,-0.13) A2(-1,-0.13) A3(1,-0.13) A4(3.5,-0.13) B1(-3.5,2.49) B2(-1,2.49) B3(1,2.49) B4(3.5,2.49)
  silkscreen extent -6.88,-13.71 6.9,-5.23, body extent -6.2,-13.03 6.3,5.07, height 13.62

## Part data
B1: "BATTERY LITHIUM 3V RECHARGE PC PINS"
C1 C2 C3 C29 C32 C33 C35 C69 C72: "Tantalum capacitor. Case B"
C4 C5 C6 C7 C9 C10 C12 C13 C14 C15 C16 C17 C18 C19 C20 C21 C22 C23 C24 C25 C26 C27 C28 C30 C31 C34 C38 C39 C40 C41 C42 C43 C44 C45 C46 C47 C48 C49 C50 C51 C52 C53 C54 C55 C56 C57 C58 C59 C60 C61 C62 C63 C64 C65 C66 C67 C68 C70 C73 C74 C75 C76 C77 C78 C79 C80 C81 C82 C83 C84 C85: "Ceramic capacitor C0603"
C8 C71: "Tantalum capacitor. Case A"
C36 C37: "0805 Ceramic X5R"
D1 D2 D3: "LED 0805"
F1 F2 F3 F4: "Thin Film Fuse"
L1 L6 L7 L8: "Chip EMIFILr Inductor Type"
L2 L3 L4 L5: "Low profile wire-wound common choke coil"
P1: "DC POWER JACK"
P2: "Mini USB Type B CONNECTOR"
P3: library part Mol_49225-0821, "Connector for microSD™ Card (Push-push Type)"
P4: "Mini USB Type AB CONNECTOR"
P5 P6: "USB HOST Type A Double CONNECTOR"
P7 P8: "Network filter/connector RJ45"
P9: "2.54x2.54mm double row connector, 28pins"
P10: "1.0 HDMI RIGHT ANGLE 19-pin"
P11 P12: "Dual Raw Socket Strip"
P13: "S-Video PCB-Connector 4 pin"
P14 P15 P16 P17: "Audio connector mini-jack 3.5mm, 3 pins"
P18: "CONN RECEPT 34POS DUAL SMD"
P19 P20: "Fine Pitch SMT Stacking Connectors"
R1 R2 R3 R4 R5 R6 R7 R8 R9 R10 R11 R12 R13 R14 R15 R16 R17 R18 R19 R20 R21 R22 R23 R24 R25 R26 R27 R28 R29 R30 R31 R32 R33 R34 R35 R36 R37 R38 R39 R40 R41 R42 R43 R44 R45 R46 R47 R48 R49 R50 R51 R52 R53 R54 R55 R58 R100: "Resistor 0603"
R56 R57: "Film resistor"
RR1 RR2 RR3 RR4 RR5 RR6 RR7 RR8 RR9 RR10 RR11 RR12 RR13 RR14 RR15 RR16: "Resistor network 4x"
RT1: "POLYSWITCH PTC RESET 0.1A"
S1 S2: "Push button"
SW1: "Jumper 2-pin 2.54mm"
U1: "800mA Low-Dropout Linear Regulator"
U2: "Single chip USB to USART transfer interface."
U5: "USB 2.0 High-Speed HUB controller"
U6: "lan9221i"
U7: library part tfp513_1, "TI PanelBus digital transmitter"
U8: "2bit Bidirectional voltage translator"
U9: "LOW INPUT VOLTAGE, CAP FREE 150-mA"
U10: library part SN74LVC1T45, "Single-Bit Dual-Supply Bus Transceiver"
U11: "LOW-POWER STEREO AUDIO CODEC FOR PORTABLE AUDIO/TELEPHONY"
X1 X2 X3 X4 X5 X6 X7 X8: library part "Point Pick", "Pick Point"
Y1: library part KX-12B, "Quartz crystal  SMD"
Y2: "Ultra Miniature Pure SiliconTM Clock Oscillator"
Y3: "Quartz oscillator 7x5mm"

## Free pads (board coordinates)
  rect 5x5 hole 3.2: 0(103.8,110) 0(103.8,178.5) 0(175,110) 0(175,178.5)
  round 5 hole 3.2: 0(137,117.5) 0(179.4,169.9)

## Via types
v1: diameter 0.7/0.7/0.7/0.7 (per signal layer), hole 0.3, Top Layer to Bottom Layer, tented both sides, 270 vias
v2: diameter 0.8, hole 0.3, Top Layer to Bottom Layer, tented both sides, 49 vias
v3: diameter 0.6/0.7/0.7/0.6 (per signal layer), hole 0.3, Top Layer to Bottom Layer, tented both sides, 47 vias
v4: diameter 0.6, hole 0.3, Top Layer to Bottom Layer, tented both sides, 43 vias
v5: diameter 1.1/1.1/1.1/1.1 (per signal layer), hole 0.6, Top Layer to Bottom Layer, tented both sides, 32 vias
v6: diameter 0.8/0.8/0.8/0.8 (per signal layer), hole 0.4, Top Layer to Bottom Layer, tented both sides, 31 vias
v7: diameter 0.9/0.9/0.9/0.9 (per signal layer), hole 0.5, Top Layer to Bottom Layer, tented both sides, 29 vias
v8: diameter 1.5/1.5/1.5/1.5 (per signal layer), hole 0.9, Top Layer to Bottom Layer, tented both sides, 14 vias
v9: diameter 1.2/1.2/1.2/1.2 (per signal layer), hole 0.6, Top Layer to Bottom Layer, tented both sides, 10 vias
v10: diameter 0.8/0.8/0.8/0.8 (per signal layer), hole 0.5, Top Layer to Bottom Layer, tented both sides, 6 vias
v11: diameter 1/1/1/1 (per signal layer), hole 0.5, Top Layer to Bottom Layer, tented both sides, 3 vias
v12: diameter 0.8/0.8/0.8/0.8 (per signal layer), hole 0.8, Top Layer to Bottom Layer, tented both sides, 2 vias
v13: diameter 1.2/1.2/1.2/1.2 (per signal layer), hole 1.2, Top Layer to Bottom Layer, tented both sides, 2 vias
v14: diameter 0.6/0.6/0.6/0.6 (per signal layer), hole 0.3, Top Layer to Bottom Layer, tented both sides, 1 vias